# EAGLE board servo_ext (EAGLE 9.6.2)
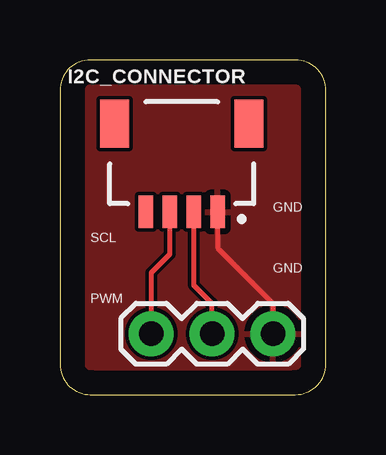
[diagram p0: board, top side]

Size 11.1 x 13.96 mm. Coordinates in mm from the lower left corner, seen from the top.
Outline: 0,12.69 0,1.27 arc90 1.27,0 9.83,0 arc90 11.1,1.27 11.1,12.69 arc90 9.83,13.96 1.27,13.96 arc90 0,12.69
Copper layers (1*16): Top 0.035mm / dielectric 1.5mm / Bottom 0.035mm
Design rules "default": minimum track width 6mil, minimum drill 0.35mm, track to track 6mil, track to pad 6mil, pad to pad 6mil, via to via 6mil, smd to smd 6mil, copper to edge 40mil, drill to drill 6mil, minimum pad ring 10mil, minimum via ring 8mil, stop-mask expansion 4mil, vias tented up to drill 0mil, thermal gap 10mil
Net classes: 1 power: width 0.305 mm

## Footprints (pad centres in the part's own frame; a part is rotated, then mirrored left to right if it is on the bottom)
JST04_1MM_RA = smd 0.6 x 1.35: 1 -1.5,0; 2 -0.5,0; 3 0.5,0; 4 1.5,0 | smd 1.2 x 2: NC1 2.8,-3.675; NC2 -2.8,-3.675
1X03 = drill 1.016 pad 1.88: 1 0,0; 2 2.54,0; 3 5.08,0

## Placement (x,y rotation side)
I2C_CONNECTOR  [JST04_1MM_RA]  5.08,7.62 180 top
M1  SERVO  [1X03]  3.81,2.54 0 top

## Library data of the parts
I2C_CONNECTOR = SparkFun-Connectors; PROD_ID: CONN-13694
M1 = SparkFun-Electromechanical

## Nets
GND: I2C_CONNECTOR.1 M1.3
N$1: I2C_CONNECTOR.3 M1.1
N$2: I2C_CONNECTOR.2 M1.2

## Tracks (layer width: path | path; a pad name or v marks a point on that pad's centre or on a via)
GND
  Top 0.152: I2C_CONNECTOR.1 6.58,8
  Top 0.203: I2C_CONNECTOR.1 6.58,6.12 8.89,3.81 M1.3
  pour Top: 0,12.7 arc-90 1.27,13.97 10.16,13.97 arc-90 11.43,12.7 11.43,1.27 arc-90 10.16,0 1.27,0 arc-90 0,1.27
N$1
  Top 0.203: I2C_CONNECTOR.3 4.58,5.85 3.81,5.08 M1.1
N$2
  Top 0.203: M1.2 6.35,3.81 5.58,4.58 I2C_CONNECTOR.2

## Text on the board
tNames: GND | SCL | GND | PWM